# EAGLE board powerboard (EAGLE 9.6.2)
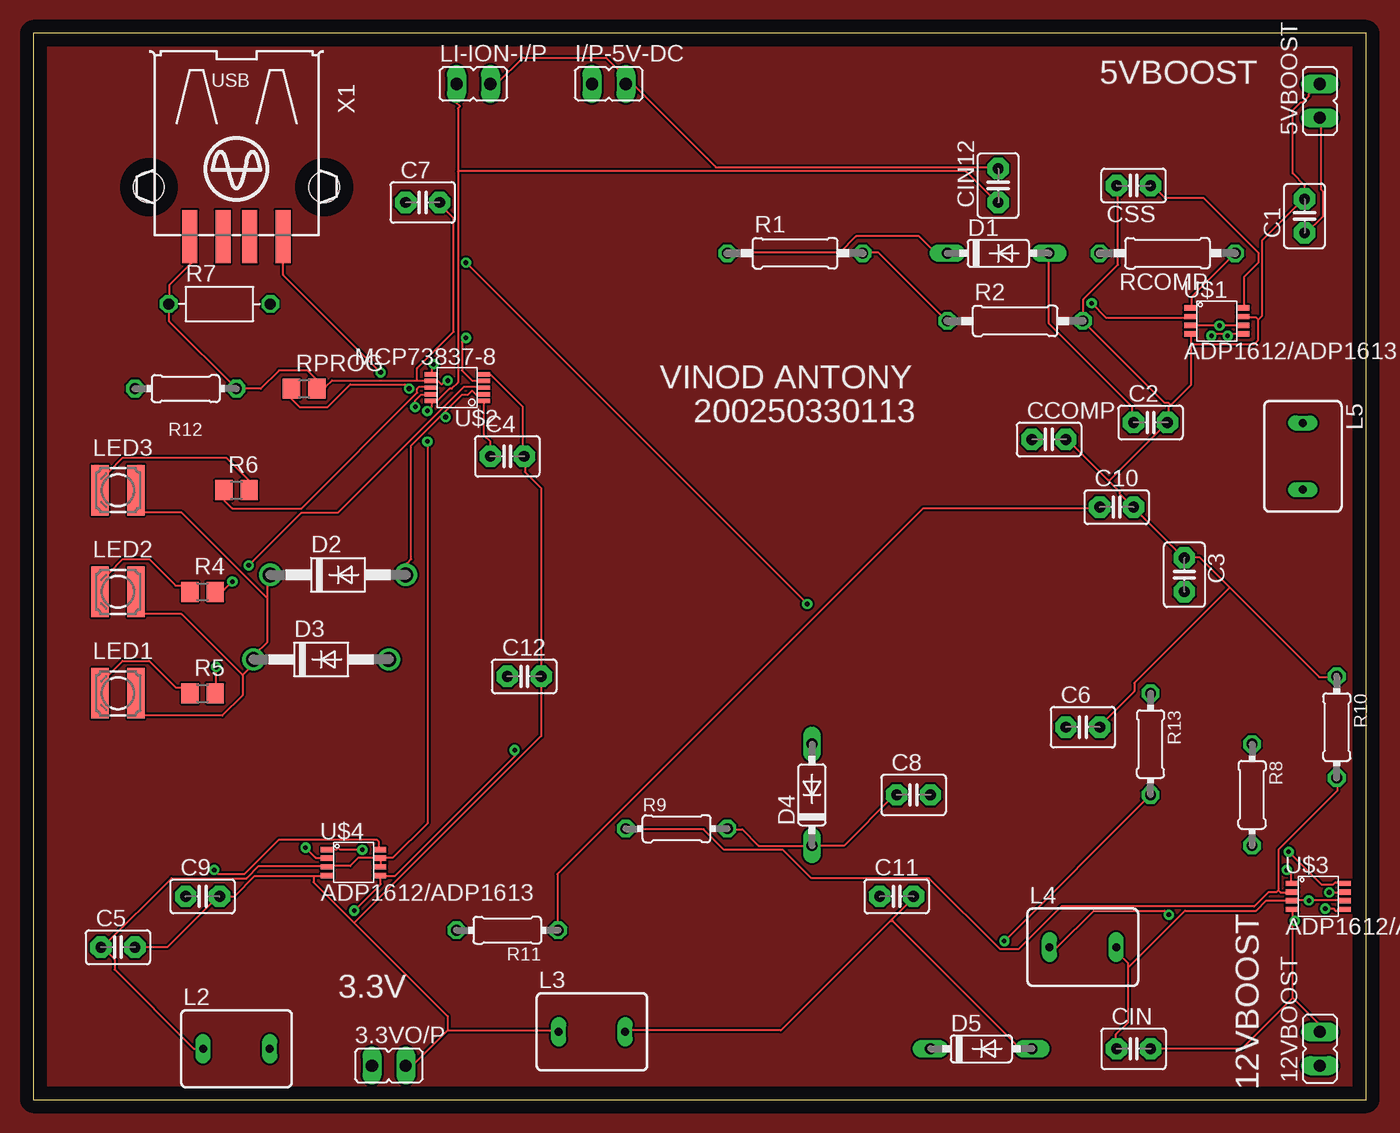
[diagram p0: board, top side]
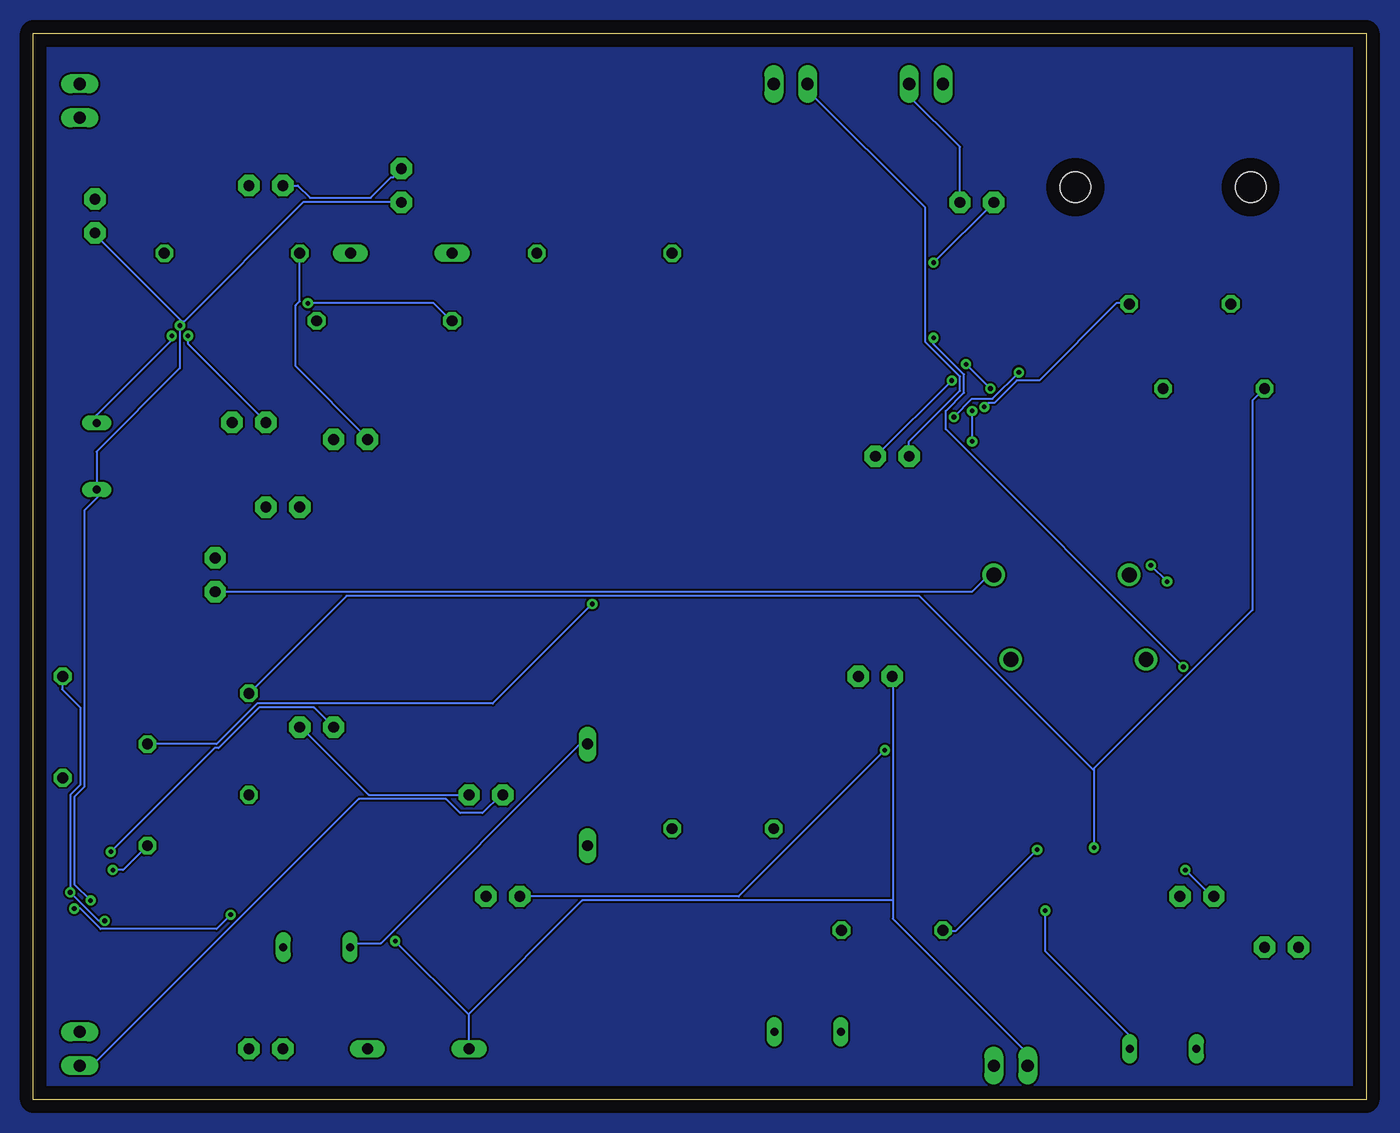
[diagram p1: board, bottom side, seen from below]

Size 100 x 80 mm. Coordinates in mm from the lower left corner, seen from the top.
Outline: 0,0 100,0 100,80 0,80 0,0
Copper layers (1*16): Top 0.035mm / dielectric 1.5mm / Bottom 0.035mm
Design rules "default": minimum track width 6mil, minimum drill 0.35mm, track to track 6mil, track to pad 6mil, pad to pad 6mil, via to via 6mil, smd to smd 6mil, copper to edge 40mil, drill to drill 6mil, minimum pad ring 10mil, minimum via ring 8mil, stop-mask expansion 4mil, vias tented up to drill 0mil, thermal gap 10mil

## Footprints (pad centres in the part's own frame; a part is rotated, then mirrored left to right if it is on the bottom)
JP1 = drill 0.914 long: 1 0,-1.27; 2 0,1.27
C2.5-3 = drill 0.813 pad 1.6 octagon: 1 -1.27,0; 2 1.27,0
C2.5-2 = drill 0.813 pad 1.6 octagon: 1 -1.27,0; 2 1.27,0
DO35-7 = drill 0.813 long: A 3.81,0; C -3.81,0
DO41-10 = drill 1.118: A 5.08,0; C -5.08,0
BS75 = drill 0.6 long: 1 -2.5,0; 2 2.5,0
NFSG036BT = smd 1.3 x 3.8: A 1.35,0; C -1.35,0
0207/10 = drill 0.813 octagon: 1 -5.08,0; 2 5.08,0
R0805 = smd 1.3 x 1.5: 1 -0.95,0; 2 0.95,0
R-7,5 = drill 0.813 octagon: 1 -3.81,0; 2 3.81,0
0204/7 = drill 0.813 octagon: 1 -3.81,0; 2 3.81,0
ADP1612/ADP1613 = smd 0.95 x 0.4: P$1 -2.085,0.975; P$2 -2.085,0.325; P$3 -2.085,-0.325; P$4 -2.085,-0.975; P$5 1.865,-0.975; P$6 1.865,-0.325; P$7 1.865,0.325; P$8 1.865,0.975
MCP73837/8 = smd 0.95 x 0.33: P$1 -2.035,0.92; P$2 -2.035,0.42; P$3 -2.035,-0.08; P$4 -2.035,-0.58; P$5 -2.035,-1.08; P$6 1.915,-1.08; P$7 1.915,-0.58; P$8 1.915,-0.08; P$9 1.915,0.42; P$10 1.915,0.92
USB-A003 = smd 1.12 x 4: 1 -3.5,14; 2 -1,14; 3 1,14; 4 3.5,14 | hole 2.3: -6.57,10.28; 6.57,10.28

## Placement (x,y rotation side)
3.3VO/P  [JP1]  26.67,2.54 270 top
5VBOOST  [JP1]  96.52,74.93 0 top
12VBOOST  [JP1]  96.52,3.81 0 top
C1  4.7uF  [C2.5-3]  95.38,66.29 90 top
C2  10uF  [C2.5-2]  83.82,50.8 0 top
C3  4.7uF  [C2.5-3]  86.36,39.37 270 top
C4  4.7uF  [C2.5-3]  35.56,48.26 0 top
C5  10uF  [C2.5-2]  6.35,11.43 0 top
C6  33nF  [C2.5-3]  78.74,27.94 0 top
C7  1800pF  [C2.5-3]  29.21,67.31 0 top
C8  10uF  [C2.5-3]  66.04,22.86 0 top
C9  33nF  [C2.5-2]  12.7,15.24 0 top
C10  220pF  [C2.5-2]  81.28,44.45 0 top
C11  10uF  [C2.5-2]  64.77,15.24 0 top
C12  10uF  [C2.5-2]  36.83,31.75 0 top
CCOMP  3300pF  [C2.5-2]  76.2,49.53 0 top
CIN  10uF  [C2.5-3]  82.55,3.81 0 top
CIN12  10uF  [C2.5-3]  72.39,68.58 90 top
CSS  33nF  [C2.5-2]  82.55,68.58 180 top
D1  3A,4V  [DO35-7]  72.39,63.5 0 top
D2  1N4004  [DO41-10]  22.86,39.37 0 top
D3  1N4004  [DO41-10]  21.59,33.02 0 top
D4  2A,20V  [DO35-7]  58.42,22.86 90 top
D5  2A,10V  [DO35-7]  71.12,3.81 0 top
I/P-5V-DC  [JP1]  43.18,76.2 270 top
L2  4.7uH  [BS75]  15.24,3.81 0 top
L3  4.3uH  [BS75]  41.91,5.08 0 top
L4  [BS75]  78.74,11.43 0 top
L5  [BS75]  95.25,48.26 270 top
LED1  NFSG036BT  [NFSG036BT]  6.35,30.48 0 top
LED2  NFSG036BT  [NFSG036BT]  6.35,38.1 0 top
LED3  NFSG036BT  [NFSG036BT]  6.35,45.72 0 top
LI-ION-I/P  [JP1]  33.02,76.2 270 top
R1  30K  [0207/10]  57.15,63.5 0 top
R2  10K  [0207/10]  73.66,58.42 0 top
R4  1K  [R0805]  12.7,38.1 0 top
R5  1K  [R0805]  12.7,30.48 0 top
R6  1K  [R0805]  15.24,45.72 0 top
R7  THERMISTOR-7,5  [R-7,5]  13.97,59.69 0 top
R8  22K  [0204/7]  91.44,22.86 270 top
R9  89.6K  [0204/7]  48.26,20.32 0 top
R10  10K  [0204/7]  97.79,27.94 270 top
R11  82K  [0204/7]  35.56,12.7 180 top
R12  10K  [0204/7]  11.43,53.34 180 top
R13  16.9K  [0204/7]  83.82,26.67 270 top
RCOMP  6.8K  [0207/10]  85.09,63.5 180 top
RPROG  [R0805]  20.32,53.34 0 top
U$1  ADP1612/ADP1613  [ADP1612/ADP1613]  88.9,58.42 0 top
U$2  MCP73837-8  [MCP73837/8]  31.75,53.34 180 top
U$3  ADP1612/ADP1613  [ADP1612/ADP1613]  96.52,15.24 0 top
U$4  ADP1612/ADP1613  [ADP1612/ADP1613]  24.13,17.78 0 top
X1  [USB-A003]  15.24,78.74 180 top

## Library data of the parts
3.3VO/P 5VBOOST 12VBOOST I/P-5V-DC LI-ION-I/P = jumper
C1-C12 CCOMP CIN CIN12 CSS = capacitor-wima
D1-D5 = diode
L2-L5 = inductor-neosid; OC_FARNELL: unknown; OC_NEWARK: unknown
LED1-LED3 = led
R1 R2 R4-R6 R8-R13 RCOMP RPROG = rcl; SPICEPREFIX: R
R7 = varistor
U$1 U$3 U$4 = VinodADPreg
U$2 = vinMCP73837-8
X1 = con-yamaichi; OC_FARNELL: unknown; OC_NEWARK: unknown

## Nets
N$1: C6.1 U$3.P$8
N$2: C2.1 D1.A L5.1 U$1.P$5
N$3: R1.2 R2.1 U$1.P$2
N$4: D1.C R1.1
N$5: RCOMP.1 U$1.P$1
N$6: CCOMP.1 RCOMP.2
N$7: CSS.1 U$1.P$8
N$8: R7.2 U$2.P$9
N$9: RPROG.1 U$2.P$6
N$10: 5VBOOST.1 C1.1 C5.1 CIN12.1 CIN.1 L2.1 L4.2 L5.2 LI-ION-I/P.1 U$1.P$3 U$1.P$6 U$2.P$10 U$3.P$3 U$3.P$6 U$4.P$3 U$4.P$6 U$4.P$7
N$11: R4.2 U$2.P$3
N$12: R5.2 U$2.P$4
N$13: R6.1 U$2.P$8
N$14: LED2.C R4.1
N$15: LED1.C R5.1
N$16: LED3.C R6.2
N$17: D2.C D3.C LED1.A LED2.A LED3.A
N$18: D4.A L4.1 U$3.P$5
N$19: C3.2 D2.A U$2.P$2 X1.1
N$20: R8.2 U$3.P$1
N$21: C4.1 I/P-5V-DC.1 U$2.P$1
N$22: C7.1 R8.1
N$23: R9.1 R10.2 U$3.P$2
N$24: 12VBOOST.1 C8.1 D4.C R9.2
N$26: C11.1 L2.2 U$4.P$5
N$28: C9.1 U$4.P$8
N$30: 3.3VO/P.2 5VBOOST.2 12VBOOST.2 C1.2 C2.2 C3.1 C4.2 C5.2 C6.2 C7.2 C8.2 C9.2 C10.2 C12.2 CCOMP.2 CIN12.2 CIN.2 CSS.2 I/P-5V-DC.2 L3.1 LI-ION-I/P.2 R2.2 R7.1 R10.1 R12.1 RPROG.2 U$1.P$4 U$1.P$7 U$2.P$5 U$2.P$7 U$3.P$4 U$3.P$7 U$4.P$4 X1.4
N$31: R11.2 U$4.P$1
N$32: C10.1 R11.1
N$34: R12.2 R13.1 U$4.P$2
N$36: C11.2 D5.A L3.2
N$38: 3.3VO/P.1 C12.1 D5.C R13.2

## Tracks (layer width: path | path; a pad name or v marks a point on that pad's centre or on a via)
GND
  pour Top: -7.62,12.7 -7.62,82.55 -5.08,85.09 101.6,85.09 104.14,82.55 104.14,1.27 106.68,-1.27 105.41,-2.54 -6.35,-2.54 -6.35,11.43
  pour Bottom: -8.89,40.64 -8.89,83.82 -6.35,86.36 101.6,86.36 105.41,82.55 105.41,2.54 106.68,1.27 109.22,-1.27 106.68,-3.81 -8.89,-3.81 -8.89,10.16 -8.89,12.7 -10.16,13.97 -10.16,39.37
N$1  (via drill 0.35)
  Top 0.152: v94.18,18.59 96.62,16.15 97.54,16.15 97.69,16.31 97.84,16.31 97.99,16.15 98.3,16.15 U$3.P$8
  Bottom 0.152: v94.18,18.59 86.41,26.36 86.11,26.36 83.06,29.41 78.94,29.41 C6.1
N$2  (via drill 0.35)
  Top 0.152: U$1.P$5 90.68,57.45 89.76,57.45 v89.61,57.3 89.46,57.45 88.54,57.45 v88.39,57.3 | D1.A 76.2,58.22 82.45,51.97 82.45,50.9 C2.1
  Bottom 0.152: v89.61,57.3 89.61,57 95.25,51.36 L5.1 | v88.39,57.3 88.39,56.69 82.6,50.9 C2.1
N$3  (via drill 0.35)
  Top 0.152: v79.4,59.74 80.47,58.67 86.72,58.67 U$1.P$2 | R1.2 62.33,63.55 63.4,63.55 68.58,58.37 R2.1
  Bottom 0.152: v79.4,59.74 69.95,59.74 68.58,58.37 R2.1
N$4
  Top 0.152: R1.1 52.12,63.55 60.5,63.55 61.72,64.77 66.45,64.77 67.67,63.55 68.58,63.55 D1.C
N$5
  Top 0.152: RCOMP.1 86.87,60.2 86.87,59.44 U$1.P$1
N$6
  Bottom 0.152: RCOMP.2 80.01,59.89 80.31,59.59 80.31,55.02 74.83,49.53 CCOMP.1
N$7
  Top 0.152: CSS.1 83.97,68.58 84.89,67.67 87.78,67.67 91.9,63.55 91.9,62.79 90.83,61.72 90.83,59.44 U$1.P$8
N$8  (via drill 0.35)
  Top 0.152: v28.65,51.97 28.65,52.43 29.11,52.88 29.72,52.88 U$2.P$9
  Bottom 0.152: v28.65,51.97 28.35,52.27 27.89,52.27 26.21,53.95 24.54,53.95 18.75,59.74 17.83,59.74 R7.2
N$9  (via drill 0.35)
  Top 0.152: v30.02,55.17 29.87,55.02 29.87,54.56 U$2.P$6 | v28.19,53.34 27.89,53.65 23.77,53.65 22.1,51.97 19.96,51.97 19.36,52.58 19.36,53.34 RPROG.1
  Bottom 0.152: v28.19,53.34 v30.02,55.17
N$10  (via drill 0.35)
  Top 0.152: U$4.P$7 25.91,18.14 24.38,18.14 23.77,17.53 22.1,17.53 U$4.P$3 21.95,17.53 16.92,17.53 16,16.61 10.36,16.61 5.18,11.43 | U$4.P$6 26.06,17.53 26.06,17.98 U$4.P$7 | L2.1 12.04,3.81 6.1,9.75 6.1,10.52 5.18,11.43 | 5.18,11.43 C5.1 | U$3.P$6 98.3,14.94 v95.71,14.94 94.49,14.94 U$3.P$3 94.34,14.94 92.51,14.94 91.75,14.17 86.41,14.17 82.14,9.91 | 82.14,9.91 82.14,5.79 81.23,4.88 81.23,3.81 CIN.1 | 82.14,9.91 82.14,10.21 81.38,10.97 81.38,11.43 L4.2 | 31.85,69.65 31.85,74.37 32,74.52 31.7,74.83 31.7,76.2 LI-ION-I/P.1 | 31.85,69.65 31.85,53.8 31.39,53.34 31.24,53.34 30.33,52.43 29.87,52.43 U$2.P$10 29.87,52.27 29.87,51.97 v29.57,51.66 | 5VBOOST.1 96.62,73.61 96.62,68.28 96.77,68.12 96.77,66.29 95.4,64.92 C1.1 | U$1.P$3 86.87,58.06 v89,58.06 90.68,58.06 U$1.P$6 | 31.85,69.65 69.95,69.65 72.39,67.21 CIN12.1 | v29.57,49.38 29.57,20.73 26.98,18.14 26.06,18.14 U$4.P$7
  Bottom 0.152: 88.7,58.37 v89,58.06 89,54.86 95.25,48.62 L5.2 95.25,45.72 95.1,45.57 95.1,45.26 96.16,44.2 96.16,23.47 96.93,22.71 96.93,16.15 v95.71,14.94 | 88.7,58.37 79.7,67.36 72.39,67.36 CIN12.1 | 88.7,58.37 88.85,58.37 94.94,64.47 94.94,64.62 95.25,64.92 C1.1 | v29.57,51.66 v29.57,49.38
N$11  (via drill 0.35)
  Top 0.152: v16.15,40.08 20.12,44.04 22.86,44.04 32.31,53.49 33.68,53.49 U$2.P$3 | v14.94,38.86 14.33,38.25 13.72,38.25 13.56,38.1 R4.2
  Bottom 0.152: v14.94,38.86 v16.15,40.08
N$12  (via drill 0.35)
  Top 0.152: v32.46,57.15 32.16,56.84 32.16,54.71 32.92,53.95 33.68,53.95 U$2.P$4 | v13.72,32.46 13.72,30.48 R5.2
  Bottom 0.152: v32.46,57.15 32.46,56.69 30.18,54.41 30.18,53.03 31.55,51.66 31.55,50.29 v13.72,32.46
N$13
  Top 0.152: U$2.P$8 29.72,53.49 28.96,53.49 28.8,53.34 28.8,53.03 20.12,44.35 14.94,44.35 14.33,44.96 14.33,45.72 R6.1
N$14
  Top 0.152: R4.1 11.73,38.1 11.73,38.56 10.67,38.56 8.69,40.54 6.71,40.54 5.64,39.47 5.18,39.47 5.03,39.32 5.03,38.1 LED2.C
N$15
  Top 0.152: R5.1 11.73,30.48 11.73,30.94 10.67,30.94 8.69,32.92 6.71,32.92 5.64,31.85 5.18,31.85 5.03,31.7 5.03,30.48 LED1.C
N$16
  Top 0.152: R6.2 16.15,45.72 16.15,46.48 14.48,48.16 6.71,48.16 5.64,47.09 5.18,47.09 5.03,46.94 5.03,45.72 LED3.C
N$17
  Top 0.152: 17.53,37.64 17.53,39.17 17.68,39.32 D2.C | 17.53,37.64 17.53,34.29 16.61,33.38 16.61,33.07 D3.C 16.46,32.92 16.46,32.61 15.7,31.85 | 15.7,31.85 15.7,30.33 14.17,28.8 7.92,28.8 7.77,28.96 7.77,30.48 LED1.A | 15.7,31.85 11.12,36.42 7.92,36.42 7.77,36.58 7.77,38.1 LED2.A | 17.53,37.64 11.12,44.04 7.92,44.04 7.77,44.2 7.77,45.72 LED3.A
N$18  (via drill 0.35)
  Top 0.152: v96.93,14.33 97.54,14.33 97.69,14.17 97.84,14.17 97.99,14.33 98.3,14.33 U$3.P$5 | v85.19,13.87 84.89,14.17 79.55,14.17 76.81,11.43 L4.1
  Bottom 0.152: v96.93,14.33 96.47,14.33 94.94,12.8 86.26,12.8 v85.19,13.87 | D4.A 58.98,26.67 73.91,11.73 75.89,11.73 76.2,11.43 L4.1
N$19  (via drill 0.35)
  Top 0.152: 30.63,51.36 28.35,49.07 28.35,40.54 28.04,40.23 28.04,39.47 D2.A | 30.63,51.36 32.16,52.88 32.61,52.88 32.92,53.19 33.22,52.88 33.68,52.88 U$2.P$2 | v26.06,54.56 18.75,61.87 18.75,64.62 X1.1 | v30.94,51.21 30.79,51.21 30.63,51.36
  Bottom 0.152: C3.2 29.57,38.1 28.35,39.32 28.04,39.32 D2.A | v26.06,54.56 28.04,52.58 29.57,52.58 v30.94,51.21
N$20  (via drill 0.35)
  Top 0.152: v94.03,17.22 94.34,16.92 94.34,16.31 U$3.P$1
  Bottom 0.152: v94.03,17.22 93.27,17.22 R8.2
N$21
  Top 0.152: C4.1 34.29,49.38 33.83,49.84 33.83,52.27 U$2.P$1
  Bottom 0.152: I/P-5V-DC.1 41.91,75.74 33.07,66.9 33.07,56.84 30.48,54.25 30.48,53.19 34.29,49.38 C4.1
N$22  (via drill 0.35)
  Top 0.152: v32.46,62.79 v58.06,37.19
  Bottom 0.152: R8.1 86.26,26.67 83.21,29.72 65.53,29.72 v58.06,37.19 | C7.1 v32.46,62.79
N$23
  Top 0.152: 93.42,15.7 93.57,15.54 94.34,15.54 U$3.P$2 | 93.42,15.7 93.42,18.75 97.84,23.16 97.84,24.08 R10.2 | 93.42,15.7 93.27,15.54 92.66,15.54 91.59,14.48 77.11,14.48 73.91,11.28 72.54,11.28 67.21,16.61 58.37,16.61 56.24,18.75 51.82,18.75 50.29,20.27 44.5,20.27 R9.1
N$24
  Top 0.152: R9.2 52.12,20.27 53.19,20.27 54.41,19.05 D4.C 60.81,19.05 64.62,22.86 C8.1
  Bottom 0.152: C8.1 64.92,22.86 66.29,21.49 67.97,21.49 69.04,22.55 75.59,22.55 95.56,2.59 96.47,2.59 12VBOOST.1
N$26  (via drill 0.35)
  Top 0.152: 26.06,16.76 26.06,16.15 v24.08,14.17 | v36.12,26.21 36.12,25.76 27.13,16.76 26.06,16.76 | 26.06,16.76 U$4.P$5
  Bottom 0.152: v24.08,14.17 24.08,11.12 17.83,4.88 17.83,3.81 L2.2 | C11.1 47.09,15.24 v36.12,26.21
N$28  (via drill 0.35)
  Top 0.152: v13.56,17.22 13.87,16.92 15.85,16.92 18.44,19.51 25.76,19.51 25.91,19.36 25.91,18.9 U$4.P$8
  Bottom 0.152: v13.56,17.22 11.58,15.24 C9.1
N$30  (via drill 0.35)
  Top 0.152: 5VBOOST.2 96.47,76.2 95.71,75.44 95.71,75.29 95.25,74.83 95.1,74.83 94.49,74.22 94.49,69.49 95.4,68.58 95.4,67.67 C1.2 95.25,67.51 92.2,64.47 92.2,58.83 91.9,58.52 | 86.87,56.69 86.87,53.65 85.34,52.12 | 86.87,56.69 86.87,57.3 U$1.P$4 | 85.34,52.12 85.19,51.97 85.19,50.9 C2.2 80.77,46.48 80.62,46.48 | 91.9,58.52 91.75,58.67 90.83,58.67 U$1.P$7 | 91.9,58.52 91.9,57 91.59,56.69 86.87,56.69 | 85.34,52.12 85.19,52.27 84.89,52.27 R2.2 78.79,58.52 78.79,60.05 81.38,62.64 81.38,68.58 CSS.2 | 94.49,7.62 94.49,13.41 | 94.49,13.41 94.49,14.17 U$3.P$4 | 94.49,7.62 96.47,5.64 96.47,5.18 12VBOOST.2 | v97.23,15.54 98.3,15.54 U$3.P$7 | 94.49,13.41 v94.64,13.41 | CIN.2 90.68,3.81 94.49,7.62 | 89.76,38.41 87.48,40.69 86.41,40.69 C3.1 86.26,40.69 82.6,44.35 C10.2 82.45,44.5 81.53,45.41 81.53,45.57 80.62,46.48 | 89.76,38.41 96.47,31.7 97.69,31.7 R10.1 | 80.62,46.48 77.57,49.53 CCOMP.2 | 89.76,38.41 82.6,31.24 82.6,30.63 80.01,28.04 C6.2 | 31.09,5.18 39.32,5.18 L3.1 | 31.09,5.18 28.5,2.59 28.04,2.59 3.3VO/P.2 | 21.03,16.76 16.61,16.76 15.09,15.24 C9.2 13.87,15.24 10.06,11.43 C5.2 | 21.03,16.76 21.95,16.76 U$4.P$4 | 31.09,5.18 31.09,6.25 24.08,13.26 | 24.08,13.26 21.03,16.31 21.03,16.76 | U$2.P$5 33.83,54.41 34.29,54.41 36.73,51.97 36.73,48.31 C4.2 36.88,48.16 36.88,47.09 38.1,45.87 C12.2 38.1,27.28 24.08,13.26 | LI-ION-I/P.2 34.75,76.2 36.73,78.18 42.98,78.18 44.35,76.81 44.35,76.2 I/P-5V-DC.2 44.96,76.2 51.21,69.95 72.39,69.95 CIN12.2 | X1.4 11.73,64.62 11.73,62.94 11.89,62.79 10.21,61.11 10.21,59.74 R7.1 10.21,59.59 10.21,58.37 R12.1 17.07,53.34 18.44,54.71 20.57,54.71 21.34,53.95 21.34,53.49
  Top 0.152: 28.8,53.95 22.4,53.95 21.95,53.49 21.34,53.49 | 28.8,53.95 29.72,53.95 U$2.P$7 29.87,53.95 30.33,53.95 30.63,53.65 30.94,53.95 v31.09,53.95 | 21.34,53.49 21.18,53.34 RPROG.2 21.34,53.49 | 28.8,53.95 28.8,54.86 31.55,57.61 31.55,66.14 30.48,67.21 C7.2
  Bottom 0.152: CSS.2 80.16,68.58 79.25,67.67 74.68,67.67 73.15,69.19 73,69.19 72.39,69.8 CIN12.2 | v94.64,13.41 95.1,13.41 v97.23,15.54 97.23,22.86 96.47,23.62 96.47,29.41 97.84,30.79 97.84,31.7 R10.1 | C8.2 74.83,22.86 80.01,28.04 C6.2 | LI-ION-I/P.2 34.29,75.29 30.48,71.48 C7.2 | v31.09,53.95 36.73,48.31 C4.2
N$31  (via drill 0.35)
  Top 0.152: v24.69,18.75 23.01,18.75 22.86,18.9 22.71,18.75 22.1,18.75 U$4.P$1
  Bottom 0.152: v24.69,18.75 30.79,12.65 31.7,12.65 R11.2
N$32
  Top 0.152: R11.1 39.32,12.8 39.32,16.92 66.75,44.35 80.01,44.35 C10.1
N$34  (via drill 0.35)
  Top 0.152: v20.42,18.9 21.18,18.14 21.95,18.14 U$4.P$2
  Bottom 0.152: 20.42,24.69 20.42,24.84 8.53,36.73 8.53,52.43 R12.2 | 20.42,24.69 v20.42,18.9 | R13.1 76.5,37.8 33.53,37.8 20.42,24.69
N$36
  Top 0.152: 64.31,13.41 66.14,15.24 C11.2 | 64.31,13.41 56.08,5.18 44.5,5.18 L3.2 | D5.A 74.07,3.81 64.47,13.41 64.31,13.41
N$38  (via drill 0.35)
  Top 0.152: R13.2 v72.85,11.89
  Bottom 0.152: 67.36,6.4 67.36,3.81 D5.C | v72.85,11.89 67.36,6.4 | 35.51,14.94 35.51,31.7 C12.1 | 35.51,14.94 35.51,13.56 25.45,3.5 25.45,2.59 3.3VO/P.1 | 67.36,6.4 58.83,14.94 35.51,14.94

## Text on the board
tPlace: 5VBOOST | VINOD ANTONY | 200250330113 | 12VBOOST | 3.3V